# EAGLE board mcat-4cu-b-v2g.job (EAGLE 6.5.0)
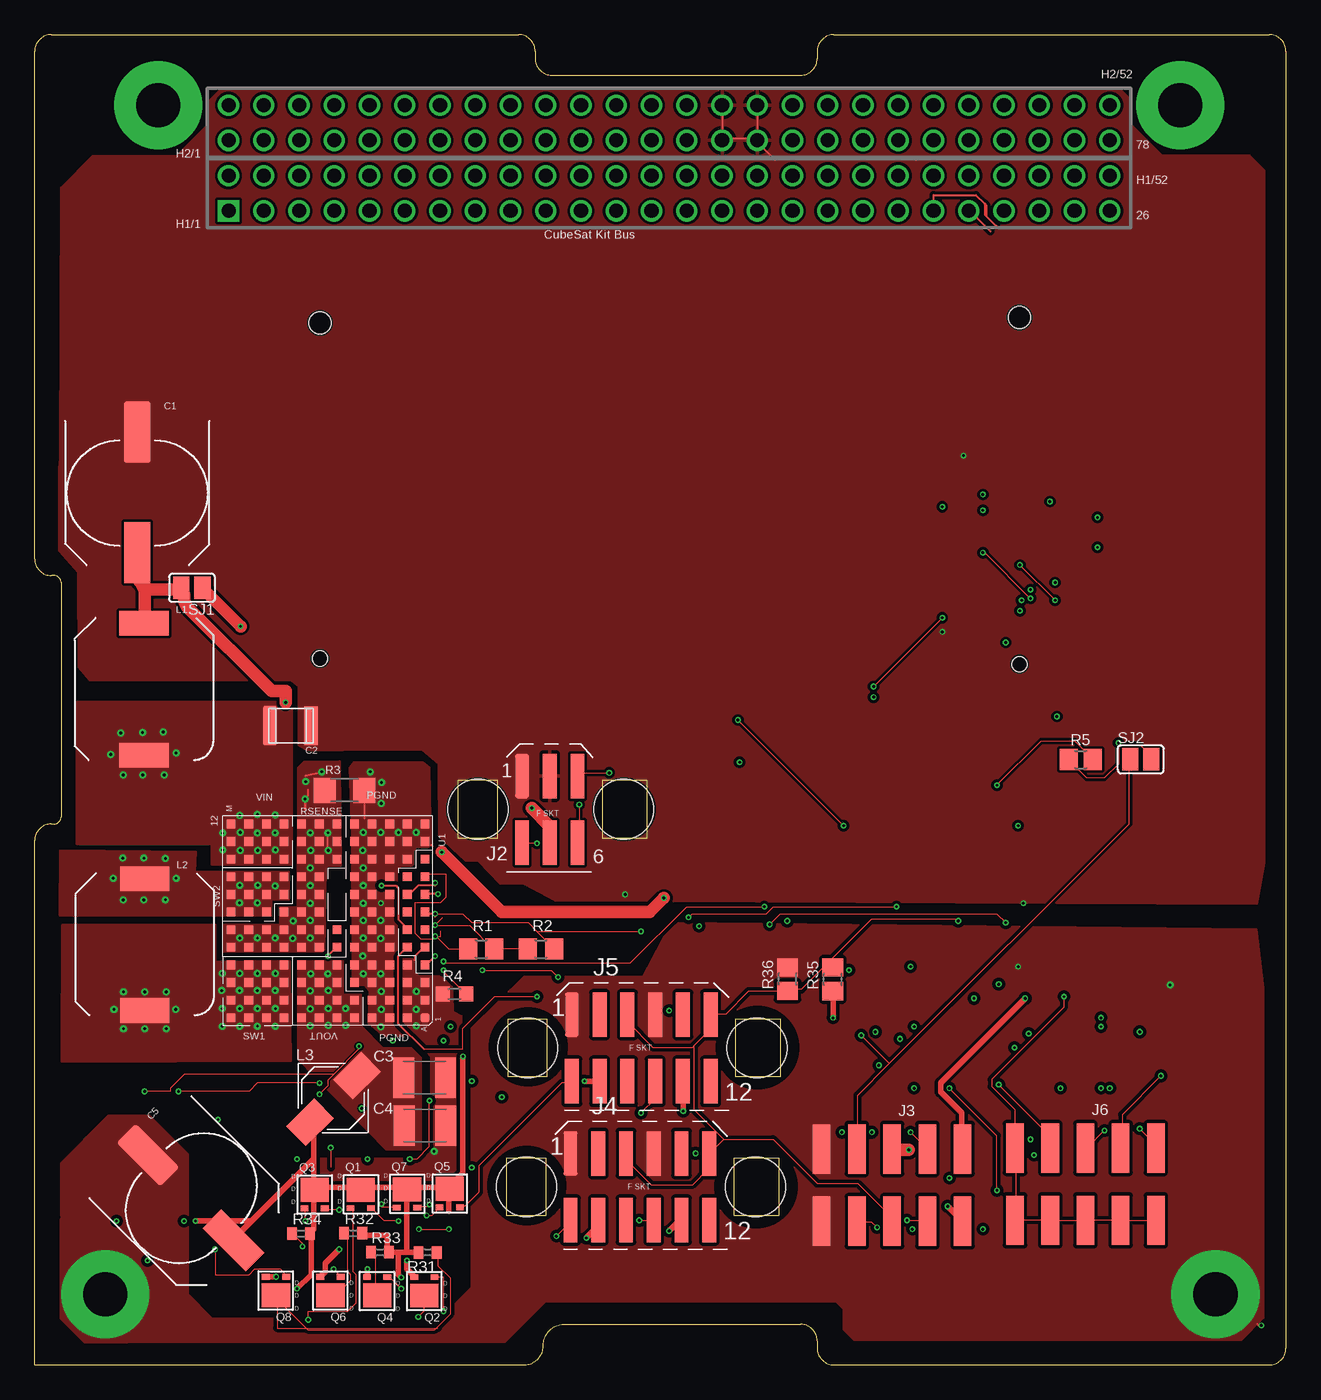
[diagram p0: board, top side]
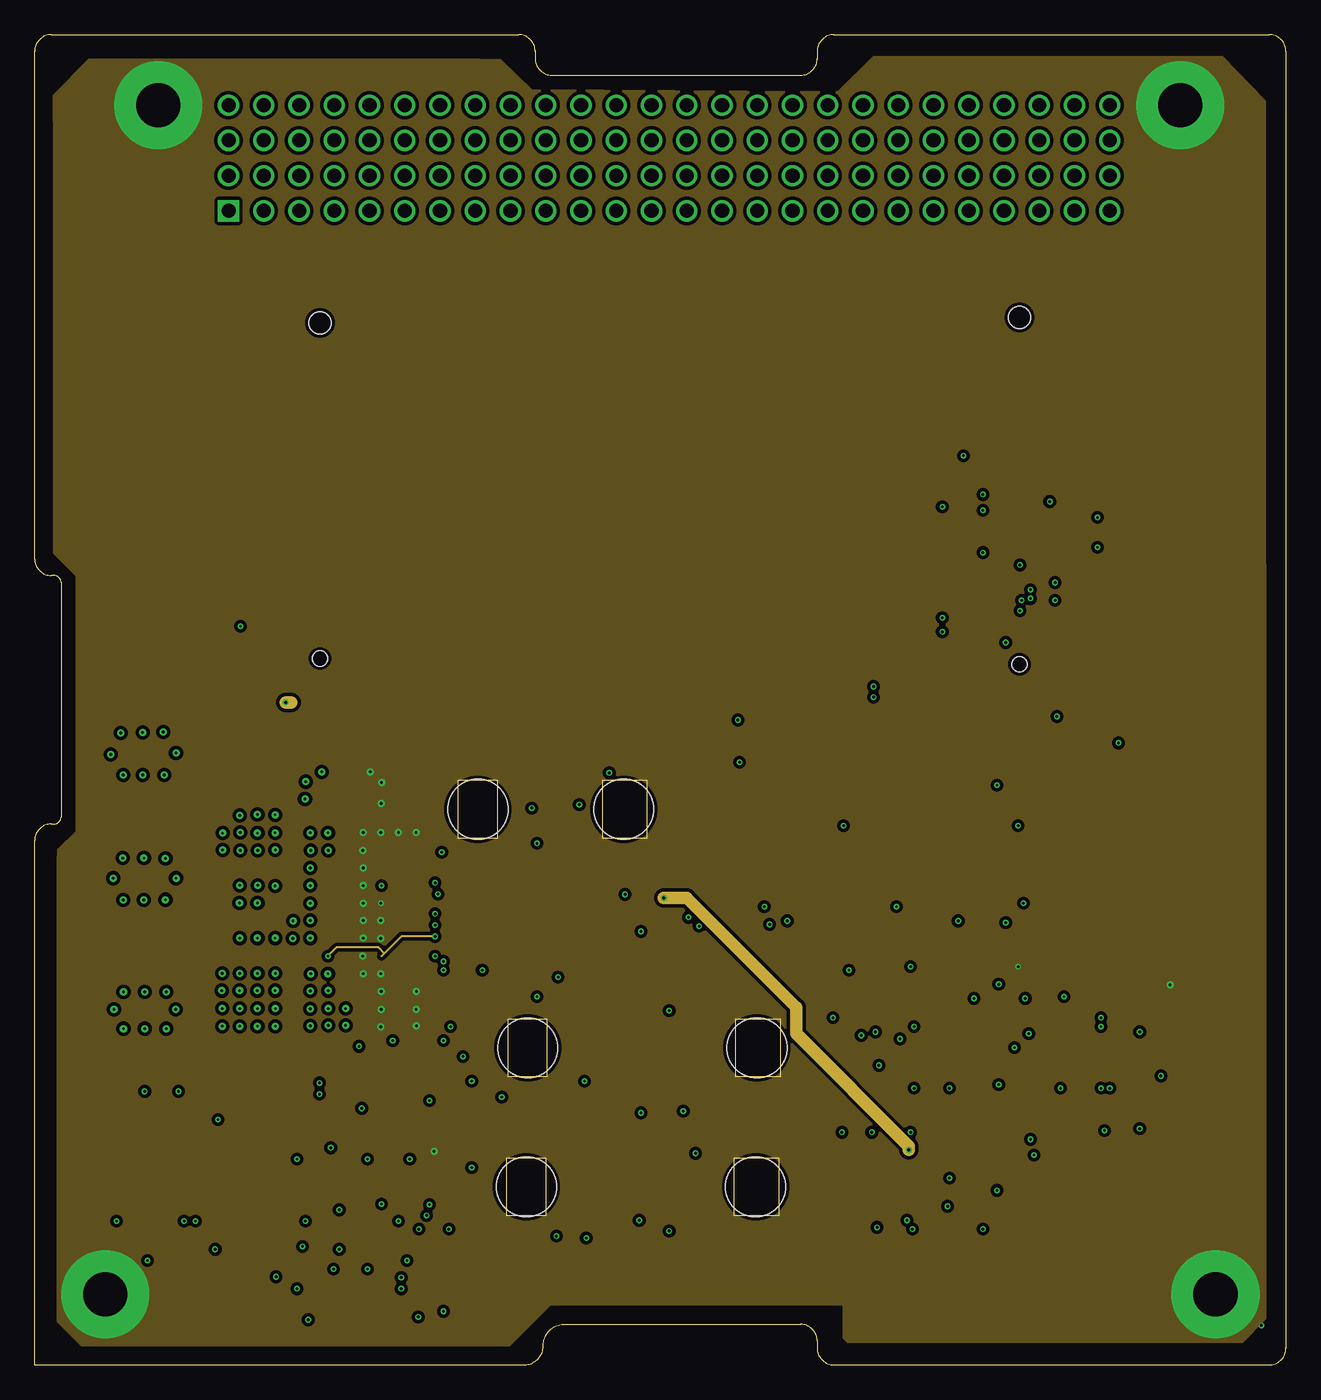
[diagram p1: board, inner layer GND_PLANE]
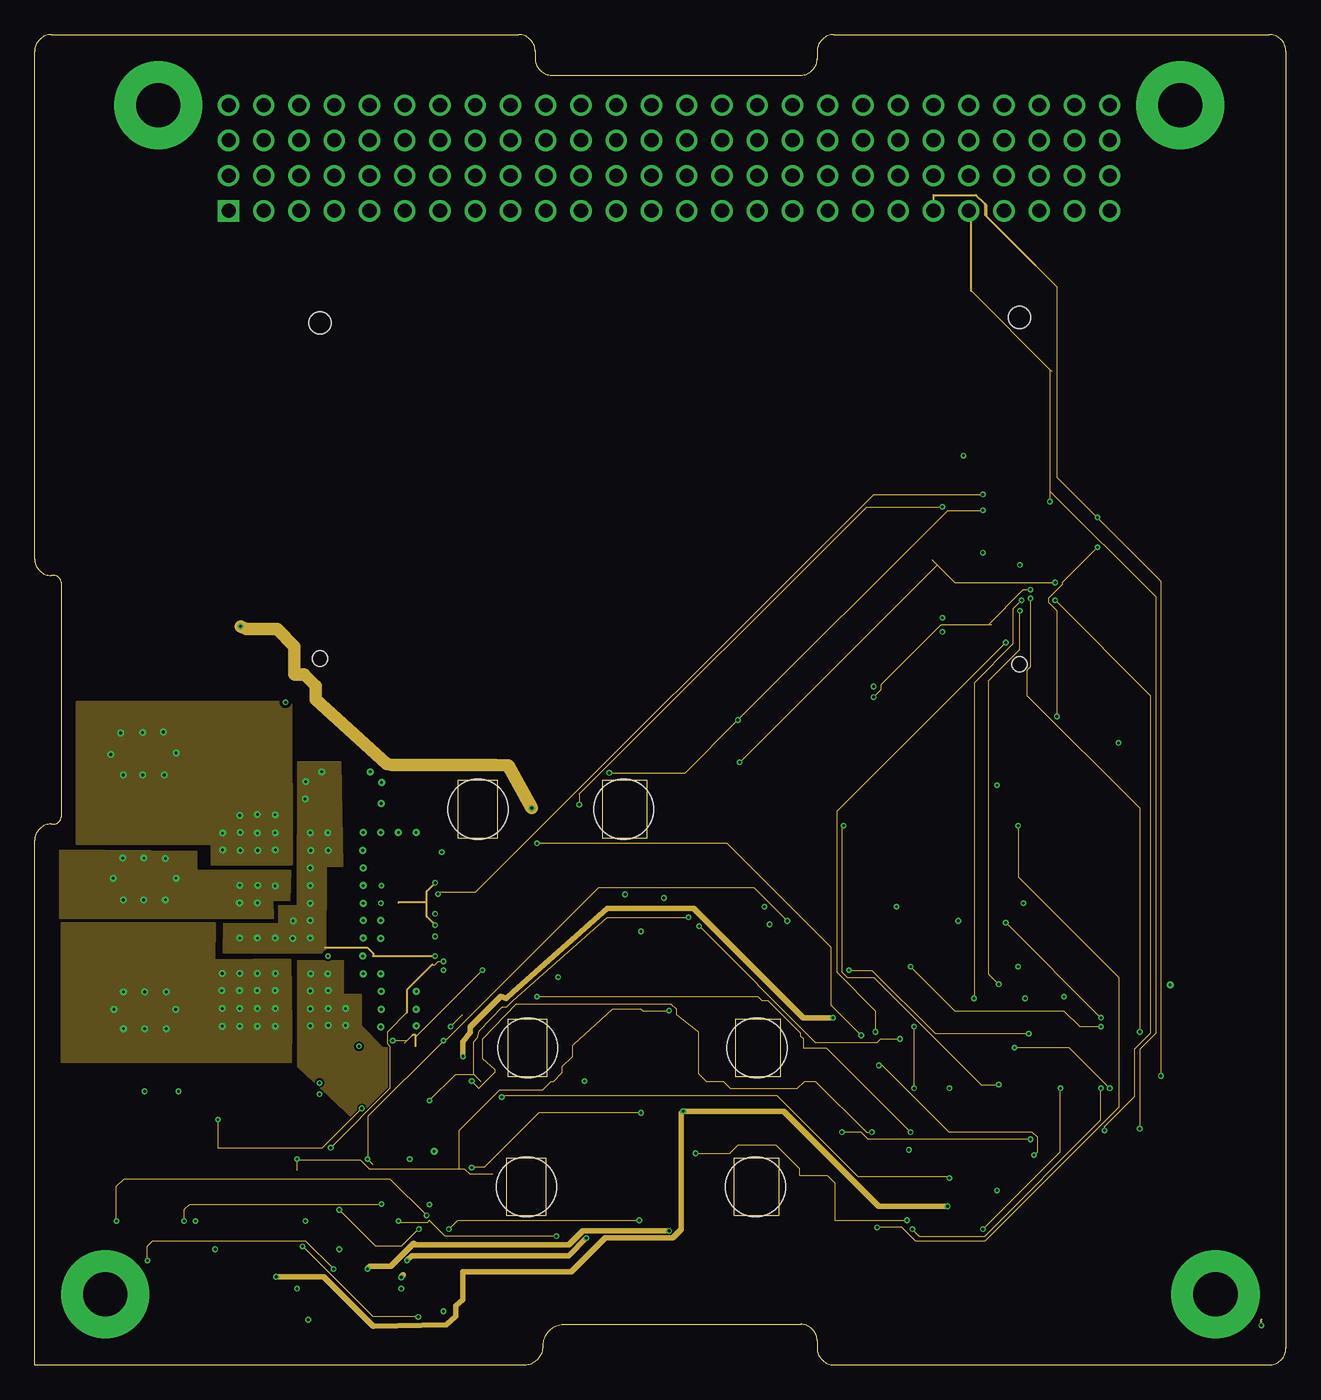
[diagram p2: board, inner layer GND_PLANE/TRACE]
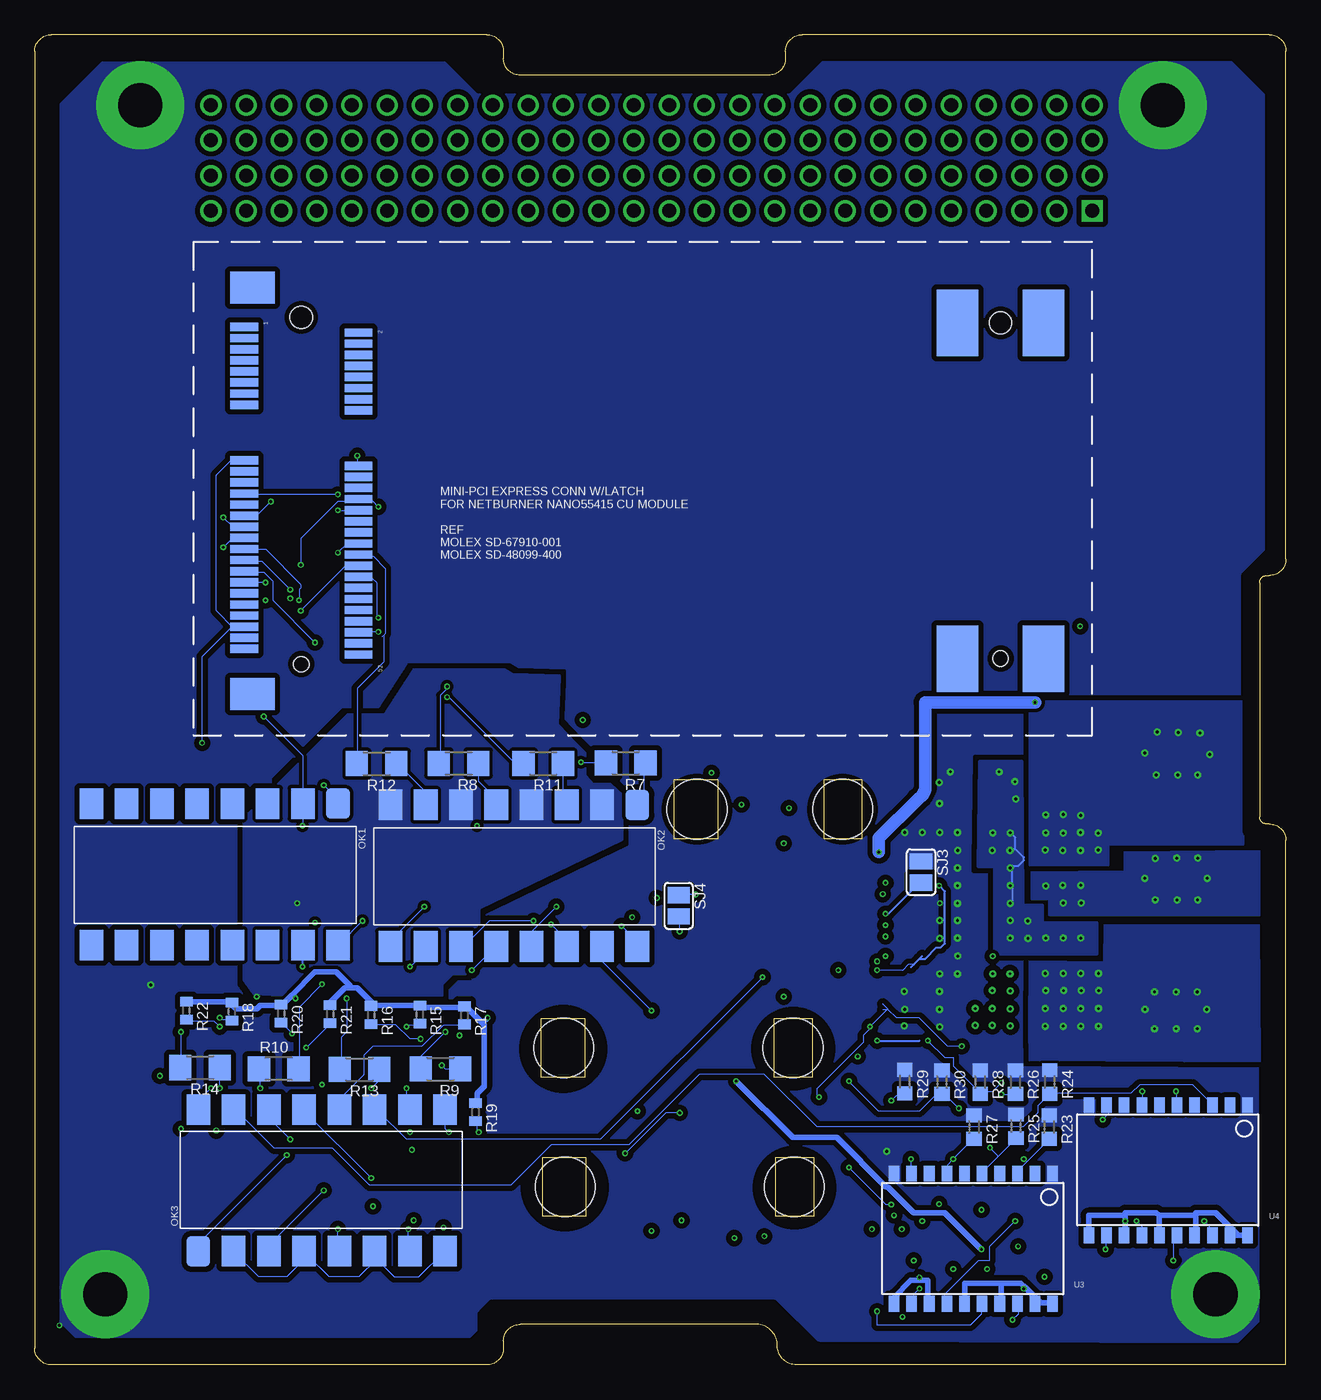
[diagram p3: board, bottom side, seen from below]

Size 90.17 x 95.89 mm. Coordinates in mm from the lower left corner, seen from the top.
Outline: 0,0 34.87,0 35.28,0 arc90 36.65,1.37 arc-90 38.12,2.92 55.19,2.92 arc-90 56.39,1.73 56.39,1.19 arc90 57.58,0 88.98,0 arc90 90.17,1.19 90.17,94.69 arc90 88.98,95.89 57.58,95.89 arc90 56.39,94.69 56.39,94.16 arc-90 55.19,92.96 37.26,92.96 arc-90 36.07,94.16 36.07,94.69 arc90 34.87,95.89 1.19,95.89 arc90 0,94.69 0,58.09 arc90 1.19,56.9 1.4,56.9 arc-90 1.91,56.39 1.91,39.5 arc-90 1.4,38.99 1.19,38.99 arc90 0,37.8 0,0
Copper layers (1+2*15+16): Top 0.035559375mm / dielectric 3.5mil / GND_PLANE 0.01778125mm / dielectric 47mil / GND_PLANE/TRACE 0.01778125mm / dielectric 3.5mil / Bottom 0.035559375mm
Design rules "mcat-4cu-b-v2g *": minimum track width 2mil, minimum drill 8mil, track to track 5mil, track to pad 5mil, pad to pad 5mil, via to via 5mil, smd to smd 5mil, copper to edge 5mil, drill to drill 5mil, minimum pad ring 8mil, minimum via ring 4mil, stop-mask expansion 0mil, vias tented up to drill 8mil, thermal gap 10mil
Net classes: 0 default: clearance 0.205 mm; 1 vout1a2ozcu: width 0.381 mm; 2 vin2a2ozcu: width 0.889 mm
tRestrict: 27 lines
bRestrict: 31 lines

## Footprints (pad centres in the part's own frame; a part is rotated, then mirrored left to right if it is on the bottom)
OS-CON-SVPF-F12 = smd 1.9 x 4.4: A1 0,-4.3; K1 0,4.4
MLCC-X7R-1210 = smd 1 x 2.8: 1 1.6,0.05; 2 -1.35,0.05
C1210K = smd 1.5 x 2.9: 1 -1.5,0; 2 1.5,0
CSK-BUS-PKG = drill 1.016 pad 1.524 square: 1 -29.21,-3.81 | drill 1.016 pad 1.524: 2 -29.21,-1.27; 3 -26.67,-3.81; 4 -26.67,-1.27; 5 -24.13,-3.81; 6 -24.13,-1.27; 7 -21.59,-3.81; 8 -21.59,-1.27; 9 -19.05,-3.81; 10 -19.05,-1.27; 11 -16.51,-3.81; 12 -16.51,-1.27; 13 -13.97,-3.81; 14 -13.97,-1.27; 15 -11.43,-3.81; 16 -11.43,-1.27; 17 -8.89,-3.81; 18 -8.89,-1.27; 19 -6.35,-3.81; 20 -6.35,-1.27; 21 -3.81,-3.81; 22 -3.81,-1.27; 23 -1.27,-3.81; 24 -1.27,-1.27; 25 1.27,-3.81; 26 1.27,-1.27; 27 3.81,-3.81; 28 3.81,-1.27; 29 6.35,-3.81; 30 6.35,-1.27; 31 8.89,-3.81; 32 8.89,-1.27; 33 11.43,-3.81; 34 11.43,-1.27; 35 13.97,-3.81; 36 13.97,-1.27; 37 16.51,-3.81; 38 16.51,-1.27; 39 19.05,-3.81; 40 19.05,-1.27; 41 21.59,-3.81; 42 21.59,-1.27; 43 24.13,-3.81; 44 24.13,-1.27; 45 26.67,-3.81; 46 26.67,-1.27; 47 29.21,-3.81; 48 29.21,-1.27; 49 31.75,-3.81; 50 31.75,-1.27; 51 34.29,-3.81; 52 34.29,-1.27; 53 -29.21,1.27; 54 -29.21,3.81; 55 -26.67,1.27; 56 -26.67,3.81; 57 -24.13,1.27; 58 -24.13,3.81; 59 -21.59,1.27; 60 -21.59,3.81; 61 -19.05,1.27; 62 -19.05,3.81; 63 -16.51,1.27; 64 -16.51,3.81; 65 -13.97,1.27; 66 -13.97,3.81; 67 -11.43,1.27; 68 -11.43,3.81; 69 -8.89,1.27; 70 -8.89,3.81; 71 -6.35,1.27; 72 -6.35,3.81; 73 -3.81,1.27; 74 -3.81,3.81; 75 -1.27,1.27; 76 -1.27,3.81; 77 1.27,1.27; 78 1.27,3.81; 79 3.81,1.27; 80 3.81,3.81; 81 6.35,1.27; 82 6.35,3.81; 83 8.89,1.27; 84 8.89,3.81; 85 11.43,1.27; 86 11.43,3.81; 87 13.97,1.27; 88 13.97,3.81; 89 16.51,1.27; 90 16.51,3.81; 91 19.05,1.27; 92 19.05,3.81; 93 21.59,1.27; 94 21.59,3.81; 95 24.13,1.27; 96 24.13,3.81; 97 26.67,1.27; 98 26.67,3.81; 99 29.21,1.27; 100 29.21,3.81; 101 31.75,1.27; 102 31.75,3.81; 103 34.29,1.27; 104 34.29,3.81
M80-68106 = smd 1 x 3.2: 1 -2,2.4; 2 0,2.4; 3 2,2.4; 4 -2,-2.4; 5 0,-2.4; 6 2,-2.4 | hole 4.318: -5.175,0; 5.335,0
AMPMODU-SMT-PIN-HEADER-5X2 = smd 1.27 x 3.556: 1 -4.826,2.54; 2 -2.286,2.54; 3 0.254,2.54; 4 2.794,2.54; 5 5.334,2.54; 6 -4.826,-2.667; 7 -2.286,-2.667; 8 0.254,-2.667; 9 2.794,-2.667; 10 5.334,-2.667
M80-68112 = smd 1 x 3.2: 1 0,2.4; 2 2,2.4; 3 4,2.4; 4 6,2.4; 5 8,2.4; 6 10,2.4; 7 0,-2.4; 8 2,-2.4; 9 4,-2.4; 10 6,-2.4; 11 8,-2.4; 12 10,-2.4 | hole 4.318: -3.175,0; 13.335,0
MSS1048 = smd 3.56 x 1.78: 1 5,9.85; 2 5,0.35
SERIES-POWER-INDUCTORS = smd 2.85 x 2 rotated 45: 1 1.75,1.6; 2 -1.65,-1.75
PS2501L-4 = smd 2.2 x 1.7: 1 -1.6,19.03; 2 -1.6,16.49; 3 -1.6,13.95; 4 -1.6,11.41; 5 -1.6,8.87; 6 -1.6,6.33; 7 -1.6,3.79; 8 -1.6,1.25; 9 8.6,1.25; 10 8.6,3.79; 11 8.6,6.33; 12 8.6,8.87; 13 8.6,11.41; 14 8.6,13.95; 15 8.6,16.49; 16 8.6,19.03
1206-8-CHIPFET = smd 2.032 x 1.727: D 0,1.321 | smd 0.559 x 0.406: G -0.736,0; S 0.736,0
R0805 = smd 1.3 x 1.5: 1 -0.95,0; 2 0.95,0
R1206 = smd 1.6 x 1.803: 1 -1.422,0; 2 1.422,0
R0603 = smd 1 x 1.1: 1 -0.85,0; 2 0.85,0
R0805' = smd 1.3 x 1.5: 1 -0.85,0; 2 0.85,0
R0402 = smd 0.7 x 0.9: 1 -0.65,0; 2 0.65,0
SJ = smd 1.168 x 1.6: 1 -0.762,0; 2 0.762,0
LGA-141-LTC-05-08-1840-B = smd 0.63 x 0.63: A1 -7.116,-10.192; A2 -5.846,-10.192; A3 -4.576,-10.192; A4 -3.306,-10.192; A5 -2.036,-10.192; A6 -0.766,-10.192; A7 0.504,-10.192; A8 1.774,-10.192; A9 3.044,-10.192; A10 4.314,-10.192; A11 5.584,-10.192; A12 6.854,-10.192; B1 -7.116,-8.922; B2 -5.846,-8.922; B3 -4.576,-8.922; B4 -3.306,-8.922; B5 -2.036,-8.922; B6 -0.766,-8.922; B7 0.504,-8.922; B8 1.774,-8.922; B9 3.044,-8.922; B10 4.314,-8.922; B11 5.584,-8.922; B12 6.854,-8.922; C1 -7.116,-7.652; C2 -5.846,-7.652; C3 -4.576,-7.652; C4 -3.306,-7.652; C5 -2.036,-7.652; C6 -0.766,-7.652; C7 0.504,-7.652; C8 1.774,-7.652; C9 3.044,-7.652; C10 4.314,-7.652; C11 5.584,-7.652; C12 6.854,-7.652; D1 -7.116,-6.382; D2 -5.846,-6.382; D3 -4.576,-6.382; D4 -3.306,-6.382; D5 -2.036,-6.382; D6 -0.766,-6.382; D7 0.504,-6.382; D8 1.774,-6.382; D9 3.044,-6.382; D10 4.314,-6.382; D11 5.584,-6.382; D12 6.854,-6.382; E1 -7.116,-5.112; E2 -5.846,-5.112; E3 -4.576,-5.112; E4 -3.306,-5.112; E5 -2.036,-5.112; E6 -0.766,-5.112; E7 0.504,-5.112; E8 1.774,-5.112; E9 3.044,-5.112; E10 4.314,-5.112; E11 5.584,-5.112; E12 6.854,-5.112; F1 -7.116,-3.842; F2 -5.846,-3.842; F3 -4.576,-3.842; F4 -3.306,-3.842; F5 -2.036,-3.842; F6 -0.766,-3.842; F10 4.314,-3.842; F11 5.584,-3.842; F12 6.854,-3.842; G1 -7.116,-2.572; G2 -5.846,-2.572; G3 -4.576,-2.572; G4 -3.306,-2.572; G5 -2.036,-2.572; G6 -0.766,-2.572; G7 0.504,-2.572; G8 1.774,-2.572; G9 3.044,-2.572; G10 4.314,-2.572; G11 5.584,-2.572; G12 6.854,-2.572; H2 -5.846,-1.302; H3 -4.576,-1.302; H4 -3.306,-1.302; H5 -2.036,-1.302; H6 -0.766,-1.302; H7 0.504,-1.302; H8 1.774,-1.302; H9 3.044,-1.302; H10 4.314,-1.302; H11 5.584,-1.302; H12 6.854,-1.302; J5 -2.036,-0.032; J6 -0.766,-0.032; J7 0.504,-0.032; J8 1.774,-0.032; J9 3.044,-0.032; J10 4.314,-0.032; J11 5.584,-0.032; J12 6.854,-0.032; K5 -2.036,1.238; K6 -0.766,1.238; K7 0.504,1.238; K8 1.774,1.238; K9 3.044,1.238; K10 4.314,1.238; K11 5.584,1.238; K12 6.854,1.238; L5 -2.036,2.508; L6 -0.766,2.508; L7 0.504,2.508; L8 1.774,2.508; L9 3.044,2.508; L10 4.314,2.508; L11 5.584,2.508; L12 6.854,2.508; M5 -2.036,3.778; M6 -0.766,3.778; M7 0.504,3.778; M8 1.774,3.778; M9 3.044,3.778; M10 4.314,3.778; M11 5.584,3.778; M12 6.854,3.778; SW1@J1 -7.116,-0.032; SW1@J2 -5.846,-0.032; SW1@J3 -4.576,-0.032; SW1@J4 -3.306,-0.032; SW1@K1 -7.116,1.238; SW1@K2 -5.846,1.238; SW1@K3 -4.576,1.238; SW1@K4 -3.306,1.238; SW1@L1 -7.116,2.508; SW1@L2 -5.846,2.508; SW1@L3 -4.576,2.508; SW1@L4 -3.306,2.508; SW1@M1 -7.116,3.778; SW1@M2 -5.846,3.778; SW1@M3 -4.576,3.778; SW1@M4 -3.306,3.778; VOUT -7.116,-1.302
MOLEX-MINI-PCI-EXPRESS-8MM-52CKT = smd 0.6 x 2: 1 -11.65,-26.8; 2 -11.248,-18.576; 3 -10.85,-26.8; 4 -10.447,-18.576; 5 -10.05,-26.8; 6 -9.648,-18.576; 7 -9.25,-26.8; 8 -8.848,-18.576; 9 -8.45,-26.8; 10 -8.047,-18.576; 11 -7.65,-26.8; 12 -7.247,-18.576; 13 -6.85,-26.8; 14 -6.447,-18.576; 15 -6.05,-26.8; 16 -5.647,-18.576; 17 -2.05,-26.8; 18 -1.647,-18.576; 19 -1.25,-26.8; 20 -0.848,-18.576; 21 -0.45,-26.8; 22 -0.048,-18.576; 23 0.35,-26.8; 24 0.752,-18.576; 25 1.15,-26.8; 26 1.552,-18.576; 27 1.95,-26.8; 28 2.353,-18.576; 29 2.75,-26.8; 30 3.152,-18.576; 31 3.55,-26.8; 32 3.953,-18.576; 33 4.35,-26.8; 34 4.753,-18.576; 35 5.15,-26.8; 36 5.553,-18.576; 37 5.95,-26.8; 38 6.353,-18.576; 39 6.75,-26.8; 40 7.152,-18.576; 41 7.55,-26.8; 42 7.952,-18.576; 43 8.35,-26.8; 44 8.752,-18.576; 45 9.15,-26.8; 46 9.553,-18.576; 47 9.95,-26.8; 48 10.352,-18.576; 49 10.75,-26.8; 50 11.152,-18.576; 51 11.55,-26.8; 52 11.953,-18.576 | smd 2.3 x 3.2: P$1 -14.5,-26.2; P$2 14.8,-26.2 | smd 4.8 x 3: P$3 12.25,24.6; P$4 -11.95,24.6; P$5 -11.95,30.8; P$6 12.25,30.8 | hole 1.6: -12.35,-22.7; -11.95,27.7 | hole 1.1: 12.65,-22.7; 12.25,27.7
20-LEAD-PLASTIC-SO = smd 0.762 x 1.143: 1 0,0; 2 1.27,0; 3 2.54,0; 4 3.81,0; 5 5.08,0; 6 6.35,0; 7 7.62,0; 8 8.89,0; 9 10.16,0; 10 11.43,0; 11 11.43,9.398; 12 10.16,9.398; 13 8.89,9.398; 14 7.62,9.398; 15 6.35,9.398; 16 5.08,9.398; 17 3.81,9.398; 18 2.54,9.398; 19 1.27,9.398; 20 0,9.398

## Placement (x,y rotation side)
C1  68uF  [OS-CON-SVPF-F12]  7.39,62.84 0 top
C2  4.7uF  [MLCC-X7R-1210]  18.56,46.12 180 top
C3  10uF  [C1210K]  28.1,20.7 0 top
C4  10uF  [C1210K]  28.13,17.24 0 top
C5  68uF  [OS-CON-SVPF-F12]  11.29,12.01 45 top
J1  2 x ESQ-126-39-G-D  [CSK-BUS-PKG]  43.18,87 0 top
J2  M80-6810642  [M80-68106]  37.12,40.04 0 top
J3  AMPMODU 5X2 SMT HDR  [AMPMODU-SMT-PIN-HEADER-5X2]  61.53,13.02 0 top
J4  M80-6811242  [M80-68112]  38.61,12.84 0 top
J5  M80-6811242  [M80-68112]  38.71,22.84 0 top
J6  AMPMODU 5X2 SMT HDR  [AMPMODU-SMT-PIN-HEADER-5X2]  75.46,13.08 0 top
L1  33 uH  [MSS1048]  2.89,43.6 0 top
L2  330 uH  [MSS1048]  2.93,25.2 0 top
L3  10 uH  [SERIES-POWER-INDUCTORS]  21.48,19.23 0 top
OK1  PS2501L-4  [PS2501L-4]  87.34,38.86 270 bottom
OK2  PS2501L-4  [PS2501L-4]  65.78,38.76 270 bottom
OK3  PS2501L-4  [PS2501L-4]  59.34,9.79 90 bottom
Q1  SI5404BDC  [1206-8-CHIPFET]  23.5,11.31 0 top
Q2  SI5404BDC  [1206-8-CHIPFET]  28.08,6.32 180 top
Q3  SI5404BDC  [1206-8-CHIPFET]  20.17,11.28 0 top
Q4  SI5404BDC  [1206-8-CHIPFET]  24.68,6.32 180 top
Q5  SI5404BDC  [1206-8-CHIPFET]  29.9,11.35 0 top
Q6  SI5404BDC  [1206-8-CHIPFET]  21.32,6.34 180 top
Q7  SI5404BDC  [1206-8-CHIPFET]  26.83,11.33 0 top
Q8  SI5404BDC  [1206-8-CHIPFET]  17.38,6.34 180 top
R1  3K79  [R0805]  32.18,29.97 0 top
R2  1K  [R0805]  36.48,29.97 0 top
R3  70 mOhms  [R1206]  22.33,41.41 0 top
R4  4k7 0.1%  [R0603]  30.26,26.73 0 top
R5  1K  [R0805']  75.38,43.63 0 top
R7  5K42  [R1206]  47.58,43.37 180 bottom
R8  5K42  [R1206]  59.63,43.36 180 bottom
R9  5K42  [R1206]  60.94,21.32 180 bottom
R10  5K42  [R1206]  72.59,21.34 0 bottom
R11  5K42  [R1206]  53.53,43.35 180 bottom
R12  5K42  [R1206]  65.53,43.33 180 bottom
R13  5K42 0.1%  [R1206]  66.77,21.3 180 bottom
R14  5K42 0.1%  [R1206]  78.26,21.42 180 bottom
R15  R-US_R0402  [R0402]  62.42,25.24 270 bottom
R16  100K 0.1%  [R0402]  65.92,25.22 270 bottom
R17  100K 0.1%  [R0402]  59.2,25.19 270 bottom
R18  100K 0.1%  [R0402]  75.96,25.46 270 bottom
R19  100K 0.1%  [R0402]  58.41,18.22 270 bottom
R20  100K 0.1%  [R0402]  72.41,25.31 270 bottom
R21  100K 0.1%  [R0402]  68.87,25.28 270 bottom
R22  100K 0.1%  [R0402]  79.24,25.53 270 bottom
R23  51K 0.1%  [R0603]  17.07,17.14 270 bottom
R24  51K 0.1%  [R0603]  17.03,20.39 270 bottom
R25  51K 0.1%  [R0603]  19.46,17.19 270 bottom
R26  51K 0.1%  [R0603]  19.5,20.37 270 bottom
R27  51K 0.1%  [R0603]  22.48,17.13 270 bottom
R28  51K 0.1%  [R0603]  22.04,20.37 270 bottom
R29  51k 0.1%  [R0603]  27.47,20.41 270 bottom
R30  51k 0.1%  [R0603]  24.79,20.37 270 bottom
R31  0.1R  [R0402]  28.32,8.11 180 top
R32  0.1R  [R0402]  22.95,9.49 0 top
R33  0.1R  [R0402]  24.88,8.11 0 top
R34  0.1R  [R0402]  19.19,9.46 0 top
R35  180R  [R0805']  57.51,27.79 90 top
R36  1K  [R0805']  54.25,27.81 90 top
SJ1  0R  [SJ]  11.33,56.01 180 top
SJ2  0R  [SJ]  79.7,43.65 0 top
SJ3  0R  [SJ]  26.3,35.52 270 bottom
SJ4  0R  [SJ]  43.77,33.09 270 bottom
U1  LTM4609MPV#PBF  [LGA-141-LTC-05-08-1840-B]  17.93,32.14 90 top
U2  UCAT-4CU-B-CONTROL-UNITNANO55415  [MOLEX-MINI-PCI-EXPRESS-8MM-52CKT]  48.26,63.16 270 bottom
U3  LT1161ISW  [20-LEAD-PLASTIC-SO]  16.82,13.79 180 bottom
U4  LT1161ISW  [20-LEAD-PLASTIC-SO]  2.77,18.73 180 bottom

## Library data of the parts
C1 C2 C5 J1-J6 L1 L2 OK1-OK3 Q1-Q8 U1-U4 = gwu_mpnl_ucat_v8
C3 C4 R1 R2 R31-R34 = rcl
L3 = gwu_mpnl_ucat_v8; MF: PANASONIC; MPN: ELL5PS100M; OC_FARNELL: 1717452
R3-R5 R7-R30 R35 R36 = resistor
SJ1-SJ4 = jumper

## Nets
CH1_P18H [vout1a2ozcu]: J4.8 Q2.S
CH1_P18L: J4.7 Q1.S
CH1HG: Q2.G U3.16
CH1LG: Q1.G U3.18
CH1S: Q2.D R34.1
CH2_P18H [vout1a2ozcu]: J4.11 Q4.S
CH2_P18L: J4.10 Q3.S
CH2HG: Q4.G U3.12
CH2LG: Q3.G U3.14
CH2S: Q4.D R33.1
CH3_P18H [vout1a2ozcu]: J5.8 Q6.S
CH3_P18L: J5.7 Q5.S
CH3HG: Q6.G U4.16
CH3LG: Q5.G U4.18
CH3S: Q6.D R32.1
CH4_P18H [vout1a2ozcu]: J3.10 J5.11 Q8.S
CH4_P18L: J3.9 J5.10 Q7.S
CH4HG: Q8.G U4.12
CH4LG: Q7.G U4.14
CH4S: Q8.D R31.1
GBD: OK3.2 OK3.4 OK3.6 OK3.8
GND: C1.K1 C2.2 J1.81 J1.82 J1.83 J1.84 J2.1 J2.2 J6.1 J6.6 J6.7 J6.8 J6.9 J6.10 OK2.2 OK2.4 OK2.6 OK2.8 SJ4.1 U2.18 U2.48
I2C(CLK): J1.43 J6.5 U2.27
I2C(DATA): J1.41 J6.4 U2.29
INTVCC: R1.1 U1.A9 U1.F5
N$4: OK2.16 R16.2
N$5: OK2.14 R18.2
N$7: OK2.12 R20.2
N$9: OK2.10 R22.2
N$10: OK3.16 R21.2
N$11: OK3.14 R19.2
N$12: OK3.12 R17.2
N$13: OK3.10 R15.2
N$16: OK1.1 R5.2
OK1E1: OK2.15 R23.2 U3.3
OK1E2: OK2.13 R25.2 U3.5
OK1E3: OK2.11 R27.2 U3.7
OK1E4: OK2.9 R29.2 U3.9
OK2E1: OK3.15 R24.2 U4.3
OK2E2: OK3.13 R26.2 U4.5
OK2E3: OK3.11 R28.2 U4.7
OK2E4: OK3.9 R30.2 U4.9
P3: R5.1 SJ2.2 U2.17 U2.47
P3_SW: J2.4 J3.2 SJ2.1
P18_SW1: OK2.1 R7.1
P18_SW2: OK2.5 R8.1
P18_SW3: OK3.1 R9.1
P18_SW4: OK3.5 R10.1
P18_SW5: OK2.3 R11.1
P18_SW6: OK2.7 R12.1
P18_SW7: OK3.3 R13.1
P18_SW8: OK3.7 R14.1
PBATT_SW [vin2a2ozcu]: J2.5 SJ1.1
PGND: C3.2 C4.2 C5.K1 J3.1 J3.6 J4.1 J4.4 J5.1 J5.4 OK1.15 R3.2 R4.1 R23.1 R24.1 R25.1 R26.1 R27.1 R28.1 R29.1 R30.1 R36.2 SJ3.1 U1.A1 U1.A2 U1.A3 U1.A5 U1.A11 U1.A12 U1.B1 U1.B2 U1.B3 U1.B4 U1.B10 U1.B11 U1.B12 U1.C1 U1.C2 U1.C3 U1.C4 U1.C5 U1.C6 U1.C7 U1.C8 U1.C9 U1.C10 U1.C11 U1.C12 U1.D1 U1.D2 U1.D3 U1.D4 U1.D5 U1.D6 U1.D7 U1.D8 U1.D9 U1.D10 U1.D11 U1.D12 U1.E3 U1.E4 U1.E5 U1.E6 U1.E7 U1.E8 U1.E9 U1.E10 U1.E11 U1.E12 U3.1 U3.10 U4.1 U4.10
PGOOD_PMA: J3.4 U1.B5
RSENSE: R3.1 U1.A4 U1.F10 U1.F11 U1.F12 U1.G5 U1.G6 U1.G7 U1.G8 U1.G9 U1.G10 U1.G11 U1.G12 U1.H5 U1.H6 U1.H7 U1.H8 U1.H9 U1.H10 U1.H11 U1.H12 U1.J5 U1.J6 U1.J7 U1.K5 U1.K6 U1.L5 U1.L6 U1.M5 U1.M6
SETFREQ: R1.2 R2.1 U1.B8
SGND: R2.2 SJ3.2 SJ4.2 U1.A7
SW1: L2.2 U1.SW1@J1 U1.SW1@J2 U1.SW1@J3 U1.SW1@J4 U1.SW1@K1 U1.SW1@K2 U1.SW1@K3 U1.SW1@K4 U1.SW1@L1 U1.SW1@L2 U1.SW1@L3 U1.SW1@L4 U1.SW1@M1 U1.SW1@M2 U1.SW1@M3 U1.SW1@M4
SW2: L2.1 U1.J8 U1.J9 U1.K7 U1.K8 U1.K9 U1.L7 U1.L8 U1.L9 U1.M7 U1.M8 U1.M9
SW_P18H1: R11.2 U2.35
SW_P18H2: R12.2 U2.34
SW_P18H3: R13.2 U2.33
SW_P18H4: R14.2 U2.32
SW_P18L1: R7.2 U2.39
SW_P18L2: R8.2 U2.38
SW_P18L3: R9.2 U2.37
SW_P18L4: R10.2 U2.36
SW_RUNPMA: U1.A8 U2.23
SW_TP1: J3.7 OK1.2 U2.31
TP1_OUT: J3.8 J4.3 J4.6 J5.3 J5.6 OK1.16 R35.2 R36.1
UART0_RX: J2.6 J6.3 U2.24
UART0_TX: J2.3 J6.2 U2.26
VBATT_IN [vin2a2ozcu]: C1.A1 J3.3 L1.1 SJ1.2
VFB: R4.2 U1.B6
VIN: C2.1 L1.2 U1.J10 U1.J11 U1.J12 U1.K10 U1.K11 U1.K12 U1.L10 U1.L11 U1.L12 U1.M10 U1.M11 U1.M12
VOUT [vout1a2ozcu]: C3.1 C4.1 L3.1 U1.E1 U1.E2 U1.F1 U1.F2 U1.F3 U1.F4 U1.G1 U1.G2 U1.G3 U1.G4 U1.H2 U1.H3 U1.H4 U1.VOUT
VOUTA [vout1a2ozcu]: C5.A1 J3.5 L3.2 Q1.D Q3.D Q5.D Q7.D R15.1 R16.1 R17.1 R18.1 R19.1 R20.1 R21.1 R22.1 R31.2 R32.2 R33.2 R34.2 R35.1 U3.11 U3.13 U3.15 U3.17 U3.19 U3.20 U4.11 U4.13 U4.15 U4.17 U4.19 U4.20

## Tracks (layer width: path | path; a pad name or v marks a point on that pad's centre or on a via)
CH1_P18H  (via drill 0.2)
  Top 0.381: v26.82,7.52 26.82,6.91 27.23,6.5 Q2.S | v39.75,9.14 40.51,9.91 40.51,10.41 J4.8
  GND_PLANE/TRACE 0.381: v26.82,7.52 27.18,7.87 38.48,7.87 v39.75,9.14
CH1_P18L  (via drill 0.2)
  Top 0.051: v26.21,10.36 25.2,10.36 24.38,11.18 Q1.S | v37.59,9.27 38.73,10.41 J4.7
  GND_PLANE/TRACE 0.051: v26.21,10.36 26.29,10.29 28.32,10.29 28.45,10.41 29.59,9.27 v37.59,9.27
CH1HG  (via drill 0.2)
  Top 0.051: v29.46,3.86 29.46,6.3 28.85,6.3 Q2.G
  Bottom 0.051: v29.46,3.86 29.46,2.85 22.76,2.85 21.95,3.66 21.95,4.27 U3.16
CH1LG  (via drill 0.2)
  Top 0.051: v19.71,3.25 19.71,3.86 22.55,3.86 23.16,4.47 23.16,6.5 22.96,6.71 22.96,11.18 Q1.G
  Bottom 0.051: v19.71,3.25 19.3,3.66 19.3,4.27 U3.18
CH1S  (via drill 0.2)
  Top 0.051: v19.3,8.53 19.3,8.74 18.69,9.35 R34.1 | v27.64,3.45 28.04,3.86 28.04,4.88 Q2.D
  GND_PLANE/TRACE 0.051: v19.3,8.53 24.38,3.45 v27.64,3.45
CH2_P18H  (via drill 0.2)
  Top 0.381: v23.98,6.91 23.98,6.5 Q4.S | v45.72,9.65 46.61,10.54 J4.11
  GND_PLANE/TRACE 0.381: v23.98,6.91 24,6.99 24.13,7.11 25.65,7.11 27.3,8.76 27.43,8.64 38.48,8.64 39.5,9.65 v45.72,9.65
CH2_P18L  (via drill 0.2)
  Top 0.051: v21.95,11.18 20.93,11.18 Q3.S | v27.69,9.78 v29.84,9.78 | v43.56,10.41 44.58,10.41 J4.10
  GND_PLANE/TRACE 0.051: v21.95,11.18 24.59,8.53 26.42,8.53 27.67,9.79 | 27.84,9.96 27.8,9.92 | 27.8,9.92 27.67,9.79 | 27.81,9.91 27.8,9.92 | v27.69,9.78 27.67,9.79 | v43.56,10.41 30.48,10.41 v29.84,9.78
CH2HG  (via drill 0.2)
  Top 0.051: v26.42,5.49 25.6,6.3 Q4.G
  Bottom 0.051: v26.42,5.49 26.82,5.08 26.82,4.47 U3.12
CH2LG  (via drill 0.2)
  Top 0.051: v19.51,10.36 19.51,11.18 Q3.G
  Bottom 0.051: v19.51,10.36 21.34,8.53 21.34,7.52 22.15,7.52 24.59,5.08 24.59,4.47 U3.14
CH2S
  Top 0.051: R33.1 24.38,7.92 24.59,7.72 24.59,5.08 Q4.D
CH3_P18H  (via drill 0.2)
  Top 0.381: v21.95,8.33 20.93,7.32 20.93,6.71 20.73,6.5 Q6.S | v39.62,20.45 40.64,20.45 J5.8
  Bottom 0.381: v21.95,8.33 24.59,10.97 26.82,10.97 28.65,12.8 28.83,12.83 32.38,16.38 35.56,16.38 v39.62,20.45
CH3_P18L
  Top 0.051: Q5.S 30.73,11.43 30.99,11.43 32,12.45 32,14.35 37.97,20.32 38.61,20.32 J5.7
CH3HG  (via drill 0.2)
  Top 0.051: v21.54,6.91 21.95,6.5 Q6.G
  GND_PLANE/TRACE 0.051: v21.54,6.91 19.51,8.94 8.51,8.94 8.13,8.56 v8.13,7.52
  Bottom 0.051: 7.92,7.52 v8.13,7.52 8.13,9.14 7.92,9.14 U4.16
CH3LG  (via drill 0.2)
  Top 0.051: v28.25,10.77 28.65,10.77 29.06,11.18 Q5.G
  GND_PLANE/TRACE 0.051: v28.25,10.77 25.6,13.41 6.44,13.41 5.89,12.87 v5.89,10.36
  Bottom 0.051: v5.89,10.36 5.49,9.96 5.49,9.35 U4.18
CH3S
  Top 0.051: R32.1 22.35,9.35 22.55,9.14 22.55,6.71 22.76,6.5 22.76,6.1 21.74,5.08 21.34,5.08 Q6.D
CH4_P18H  (via drill 0.2)
  Top 0.381: v17.4,6.35 16.76,6.35 Q8.S | v46.74,18.29 46.74,20.32 J5.11 | v65.79,11.43 66.8,10.41 J3.10
  GND_PLANE/TRACE 0.381: v17.4,6.35 20.83,6.35 24.38,2.79 29.64,2.87 30.35,3.5 30.35,4.27 30.84,4.67 30.86,6.71 38.66,6.71 41.1,9.14 45.97,9.14 46.61,9.78 46.61,18.16 v46.74,18.29 53.98,18.29 60.83,11.43 v65.79,11.43
CH4_P18L  (via drill 0.2)
  Top 0.051: 28.45,11.58 v28.45,11.56 28.45,11.38 27.64,11.38 Q7.S | v43.69,18.16 44.7,19.18 44.7,20.32 J5.10 | v62.87,10.41 64.26,10.41 J3.9
  GND_PLANE/TRACE 0.051: v31.5,14.22 32.38,14.22 36.32,18.16 v43.69,18.16 | v62.87,10.41 57.66,10.41 57.66,13.13 57.12,13.66 55.09,13.66 55.09,14.17 53.42,15.85 50.7,15.85 50.09,15.24 v47.62,15.24
  Bottom 0.051: v28.45,11.56 28.83,11.56 v31.5,14.22 | v47.62,15.24 44.7,18.16 v43.69,18.16
CH4HG  (via drill 0.2)
  Top 0.051: v13.01,8.33 13.01,6.5 15.44,6.5 15.85,6.91 17.68,6.91 18.09,6.5 Q8.G
  Bottom 0.051: v13.01,8.33 13.01,9.14 U4.12
CH4LG  (via drill 0.2)
  Top 0.051: v24.99,11.58 24.99,11.38 26.01,11.38 Q7.G
  GND_PLANE/TRACE 0.051: v10.77,10.36 10.77,11.2 11.16,11.58 v24.99,11.58
  Bottom 0.051: v10.77,10.36 10.36,9.96 10.36,9.35 U4.14
CH4S
  Top 0.051: 29.06,2.64 17.48,2.64 17.48,4.88 Q8.D 17.27,4.95 19.68,2.54 28.83,2.54 29.97,3.68 29.97,6.22 29.08,7.11 29.08,8 R31.1 29.06,7.92
GBD
  Bottom 0.051: 65.53,7.62 65.66,7.75 65.66,8.13 OK3.6 65.53,7.62 | 65.53,7.62 64.26,6.35 62.48,6.35 60.71,8.13 OK3.8 | 70.48,7.87 68.96,6.35 66.8,6.35 65.53,7.62 | 70.48,7.87 70.74,8.13 OK3.4 70.48,7.87 | 70.48,7.87 72.01,6.35 74.04,6.35 75.82,8.13 OK3.2
GND  (via drill 0.2)
  Top 0.051: J6.10 J6.9 J6.8 J6.7 70.74,10.41 | 70.74,10.41 70.74,15.62 J6.1 70.61,15.62 70.61,18.41 68.96,20.07 68.96,20.57 74.17,25.78 v74.17,26.54 | 70.74,10.41 J6.6
  Top 0.152: J1.82 49.53,88.39 | J1.84 52.07,88.39 | 52.07,88.39 49.53,88.39 | 49.53,88.39 J1.81 | 52.07,88.39 J1.83 52.07,88.14 53.24,86.97 | 53.24,86.97 53.34,86.87 63.5,86.87 | 63.6,86.97 53.24,86.97
  Bottom 0.051: v65.41,52.83 66.8,52.83 U2.48 | v66.93,65.53 66.93,64.9 U2.18 | v42.55,33.91 43.69,33.91 SJ4.1 | v74.17,26.54 74.17,26.67 74.17,26.73
  Bottom 0.152: 52.07,88.14 J1.83
  other vias: 71.25,33.27
  pour Top: 12.42,90.55 12.42,90.98 13.44,92 78.18,92 79.02,91.16 79.02,89.38 81.2,87.2 87.53,87.2 88.6,86.13 88.6,36.17 88.06,33.2 37.54,33.43 35.31,34.65 33.55,34.67 31.98,36.32 31.06,36.32 29.16,38.1 29.1,43.3 27.93,44.34 22.17,44.27 19.63,44.27 19.02,44.65 19.02,48.9 18.52,49.3 3.99,49.33 3.18,50.32 3.15,57.1 1.75,58.67 1.78,64.64 1.83,65.35 1.91,84.86 4.19,87.15 10.24,87.15 12.47,89.38 12.47,90.47
  pour Bottom (isolate 0.254, no thermals): 67.64,46.89 75.16,39.37 75.16,31.52 75.13,27.76 74.42,26.75 71.15,26.57 67.16,26.57 67.11,26.62 60.78,26.62 60.78,27.41 60.02,28.17 59.05,28.17 58.95,28.27 58.88,28.27 58.06,29.08 58.09,32.89 47.83,37.85 47.8,37.87 47.8,41.07 48.64,41.86 49.91,41.86 50.47,42.47 50.47,44.12 51.16,44.81 52.43,46.15 52.3,49.56 52.3,49.68 55.75,49.78 56.31,50.11 62.87,50.16 64.97,46.86
I2C(CLK)  (via drill 0.2)
  Top 0.051: v79.63,17.02 80.77,15.88 80.77,15.62 J6.5
  Top 0.152: 67.31,83.06 J1.43 67.46,83.11 68.89,81.69
  GND_PLANE/TRACE 0.051: 73.15,71.75 67.44,77.47 67.46,77.47 | 73.15,71.75 73.28,71.63 | 73.15,71.75 73.15,62.99 | 73.15,62.99 v73.15,62.23 | 73.15,62.99 80.77,55.37 80.77,23.88 79.63,22.73 v79.63,17.02
  GND_PLANE/TRACE 0.152: 67.46,77.42 67.46,77.47 67.46,83.11 J1.43
  Bottom 0.051: v73.15,62.23 74.17,61.21 U2.27
I2C(DATA)  (via drill 0.2)
  Top 0.051: v81.15,20.83 78.36,18.03 78.36,15.62 J6.4
  Top 0.152: 64.77,83.06 J1.41 64.77,84.33 67.82,84.33 68.45,83.69 | 68.58,82.8 68.58,83.57 68.45,83.69 | 68.45,83.69 68.48,83.72 68.48,82.91 69.29,82.09
  GND_PLANE/TRACE 0.051: 72.14,79.25 73.66,77.72 73.66,64.01 v76.58,61.09 81.15,56.52 v81.15,20.83
  GND_PLANE/TRACE 0.152: 68.58,82.8 68.58,83.57 68.45,83.69 | 68.45,83.69 67.82,84.33 64.77,84.33 J1.41 | 72.14,79.25 68.48,82.91 68.48,83.72 68.45,83.69
  Bottom 0.051: v76.58,61.09 75.95,60.45 75.18,60.45 U2.29
INTVCC  (via drill 0.2)
  Top 0.051: v28.85,30.89 28.85,30.68 27.84,30.68 27.43,31.09 27.43,33.33 29.26,33.33 29.67,33.73 29.67,35.36 28.25,35.36 | v28.85,30.89 29.26,30.89 29.26,31.29 | R1.1 31.11,29.97 29.84,29.97 28.96,30.86 v28.85,30.89
  Top 0.152: v21.13,29.46 21.74,30.07 U1.F5 | 28.25,35.36 U1.A9
  GND_PLANE 0.152: 25.2,29.67 26.42,30.89 v28.85,30.89 | 25.2,29.67 24.99,29.46 | v21.13,29.46 21.74,30.07 24.79,30.07 25.2,29.67
N$4  (via drill 0.2)
  GND_PLANE/TRACE 0.051: v62.36,23.5 60.96,23.5 60.71,23.24 56.26,23.24 v47.88,31.62
  Bottom 0.051: v62.36,23.5 63.12,23.5 64.14,24.51 65.91,24.51 R16.2 | v47.88,31.62 46.86,30.61 46.86,30.23 OK2.16
N$5  (via drill 0.2)
  Top 0.051: v69.98,31.88 69.34,32.51 53.72,32.51 v52.96,31.75
  GND_PLANE/TRACE 0.051: v69.98,31.88 v76.83,25.02
  Bottom 0.051: v76.83,25.02 76.71,24.89 76.07,24.89 R18.2 | v52.96,31.75 51.94,30.73 51.94,30.23 OK2.14
N$7  (via drill 0.2)
  GND_PLANE/TRACE 0.051: v71.63,23.88 64.9,23.88 60.33,28.45 v58.67,28.45
  Bottom 0.051: v71.63,23.88 72.39,24.64 R20.2 | v58.67,28.45 57.02,30.1 OK2.12
N$9  (via drill 0.2)
  GND_PLANE/TRACE 0.051: v76.83,24.38 75.31,24.38 74.17,25.53 66.29,25.53 v63.12,28.7
  Bottom 0.051: v76.83,24.38 77.22,24.77 79.12,24.77 R22.2 | v63.12,28.7 62.1,29.72 62.1,30.1 OK2.10
N$10  (via drill 0.2)
  GND_PLANE/TRACE 0.051: v70.61,22.86 74.55,22.86 v77.47,19.94
  Bottom 0.051: v70.61,22.86 68.96,24.51 R21.2 | v77.47,19.94 78.36,19.05 78.36,18.41 OK3.16
N$11  (via drill 0.2)
  GND_PLANE/TRACE 0.051: v58.17,16.76 59.56,16.76 60.07,16.26 v71.75,16.26
  Bottom 0.051: v58.17,16.76 58.29,16.89 58.29,17.53 R19.2 | v71.75,16.26 73.28,17.78 73.28,18.29 OK3.14
N$12
  Bottom 0.051: R17.2 59.31,24.51 60.71,24.51 62.23,22.99 65.79,22.99 66.42,22.35 66.42,20.95 68.2,19.18 68.2,18.41 OK3.12
N$13  (via drill 0.2)
  GND_PLANE/TRACE 0.051: v63.37,19.94 v63.37,24.38
  Bottom 0.051: v63.37,24.38 63.25,24.51 62.48,24.51 R15.2 | v63.37,19.94 63.37,18.54 63.25,18.41 OK3.10
N$16  (via drill 0.2)
  Top 0.051: R5.2 76.2,43.69 74.93,44.96 72.52,44.96 v69.34,41.78
  Bottom 0.051: v69.34,41.78 68.33,40.77 68.33,40.51 OK1.1
OK1E1  (via drill 0.2)
  GND_PLANE/TRACE 0.051: 18.9,14.02 v18.9,14.83 18.92,14.73 23.5,14.73 24.13,14.1 30.61,14.1 | 30.61,14.1 30.99,14.1 31.37,13.72 33.02,13.72 | v45.72,25.53 43.81,25.53 43.69,25.65 41.66,25.65 38.84,23.09 38.76,23.01 38.76,22.25 38.02,21.51 38.02,21.08 37.39,20.45 37.24,20.45 36.6,19.81 33.53,19.81 30.61,16.89 30.61,14.1
  Bottom 0.051: 18.69,14.63 19.51,13.82 U3.3 | 18.69,14.63 17.07,16.26 R23.2 | 18.69,14.63 v18.9,14.83 | v45.72,25.53 49.28,29.08 49.28,30.1 OK2.15
OK1E2  (via drill 0.2)
  Top 0.051: v21.34,15.65 21.34,14.22 | v52.58,33.02 46.99,33.02 42.93,28.96 29.59,28.96 v29.46,29.08
  GND_PLANE/TRACE 0.051: v21.34,15.65 25.6,19.91 25.6,22.96 25.4,23.16 25.4,23.98 26.82,25.4 | 28.65,28.85 28.7,28.83 28.83,28.83 29.08,29.08 v29.46,29.08
  GND_PLANE/TRACE 0.152: 26.82,25.4 26.82,27.03 28.65,28.85
  Bottom 0.051: 20.73,15.04 21.95,13.82 U3.5 | 20.73,15.04 19.51,16.26 R25.2 | v21.34,15.65 20.73,15.04 | v52.58,33.02 54.36,31.24 54.36,30.23 OK2.13
OK1E3  (via drill 0.2)
  Top 0.051: v29.46,23.37 29.59,23.37
  GND_PLANE/TRACE 0.051: 24.38,14.43 v23.98,14.83 24,14.86 24,17.91 v29.46,23.37 29.59,23.37 40.64,34.42 51.82,34.42 v54.23,32
  Bottom 0.051: R27.2 22.55,16.26 v23.98,14.83 24.38,14.43 24.38,13.82 U3.7 | v54.23,32 57.4,32 59.18,30.23 59.44,30.23 OK2.11
  Bottom 0.152: v29.46,23.37 26.42,23.37
OK1E4  (via drill 0.2)
  Top 0.051: v28.45,19.05 28.45,15.75 27.56,14.86 27.05,14.86 v27.03,14.83 | v62.1,33.02 53.21,33.02 52.7,32.51 47.37,32.51 v47.12,32.26
  GND_PLANE/TRACE 0.051: 31.62,20.95 32.13,20.45 | 31.62,20.95 30.35,20.95 v28.45,19.05 | v47.12,32.26 41.27,32.26 34.47,26.26 34.01,25.81 33.68,25.81 32.03,24.08 31.93,23.62 31.62,23.29 31.62,20.95
  Bottom 0.051: 27.64,19.71 R29.2 27.56,19.43 28.07,19.43 v28.45,19.05 | v27.03,14.83 27.03,13.82 U3.9 | v62.1,33.02 64.52,30.61 64.52,30.23 OK2.9
OK2E1
  Bottom 0.051: U4.3 5.33,18.8 6.73,20.19 10.54,20.19 11.18,19.56 17.02,19.56 R24.2 17.14,19.43 17.91,18.67 17.91,18.16 18.92,17.14 33.78,17.14 37.59,20.95 42.29,20.95 47.37,15.88 52.96,15.88 55.88,12.95 66.04,12.95 68.71,15.62 72.9,15.62 75.56,18.29 75.82,18.29 OK3.15
OK2E2  (via drill 0.2)
  Top 0.051: v20.52,19.51 21.13,20.12 21.13,20.52 21.54,20.93 | 21.54,20.93 23.37,22.76 v23.37,22.96 | v7.92,19.71 9.75,19.71 9.75,19.91 10.77,20.93 21.54,20.93
  GND_PLANE/TRACE 0.051: v29.97,24.38 30.86,25.27 | v65.91,13.46 65.79,13.59 59.31,13.59 53.47,19.43 33.78,19.43 v33.66,19.3
  Bottom 0.051: v23.37,22.96 24.38,22.96 26.42,24.99 28.04,24.99 28.65,25.6 | 28.65,25.6 28.7,25.65 | 28.7,25.65 29.06,26.01 | v20.52,19.51 19.51,19.51 R26.2 | v7.92,19.71 7.92,18.9 U4.5 | 28.65,25.6 29.06,25.6 | 28.7,25.65 v29.97,24.38 29.97,24.26 30.48,23.75 30.48,23.24 33.78,19.94 33.78,19.43 v33.66,19.3 | v65.91,13.46 70.74,18.29 OK3.13
OK2E3  (via drill 0.2)
  Top 0.051: v10.36,19.71 15.44,19.71 16.05,20.32 v20.52,20.32 | v37.72,27.94 37.21,28.45 v32.26,28.45
  GND_PLANE/TRACE 0.051: 27.23,23.77 26.82,23.37 | 26.82,23.37 26.62,23.16 | 26.82,23.37 v25.81,23.37 | 27.43,23.62 v32.26,28.45
  GND_PLANE/TRACE 0.152: 27.23,23.77 27.43,23.77 27.43,23.62 27.43,22.96
  Bottom 0.051: v25.81,23.37 24.59,22.15 23.98,22.15 23.98,21.54 22.15,19.71 R28.2 21.95,19.71 21.13,19.71 v20.52,20.32 | v10.36,19.71 10.36,18.9 U4.7 | v37.72,27.94 49.4,16.26 63.37,16.26 65.41,18.29 65.66,18.29 OK3.11
OK2E4  (via drill 0.2)
  GND_PLANE/TRACE 0.051: v23.57,18.49 20.73,15.65 13.21,15.65 v13.21,17.68 | v31.5,20.45 32,19.94 33.15,21.08 33.15,21.31 32.26,22.1 32.26,23.44 34.7,26.01 45.85,26.04 46.23,25.65 46.23,25.27 47.75,24.08 47.83,24 47.83,21.01 48.39,20.45 49.61,20.45 50.11,19.94 54.97,19.94 55.47,20.45 56.26,20.45 59.94,16.76 v60.33,16.76
  Bottom 0.051: v23.57,18.49 24.59,19.51 R30.2 24.79,19.51 25.2,19.51 26.42,18.29 29.34,18.29 v31.5,20.45 | v13.21,17.68 12.8,18.09 12.8,18.69 U4.9 | v60.33,16.76 60.58,17.02 60.58,18.29 OK3.9
P3  (via drill 0.2)
  Top 0.051: 78.11,44.7 78.11,43.31 77.09,42.29 75.82,42.29 74.55,43.56 R5.1 | 78.11,44.7 79.63,44.7 80.39,43.94 80.39,43.69 SJ2.2 | 78.11,44.7 v78.11,44.83
  Bottom 0.051: 75.82,53.09 76.07,53.09 78.11,51.05 v78.11,44.83 | 75.82,53.09 75.18,53.09 U2.47 75.82,53.09 | 75.82,53.09 77.09,54.36 77.09,64.14 76.07,65.15 75.18,65.15 U2.17
P3_SW  (via drill 0.2)
  Top 0.051: 61.59,21.72 59.31,19.43 59.31,15.62 J3.2 | 61.59,21.72 78.87,38.99 78.87,43.56 SJ2.1 | v36.2,37.59 35.18,37.59 J2.4 | 61.59,21.72 v59.56,23.75
  GND_PLANE/TRACE 0.051: v36.2,37.59 49.91,37.59 57.4,30.1 57.4,25.91 v59.56,23.75
P18_SW1
  Bottom 0.051: R7.1 46.23,43.31 46.23,40.89 46.74,40.39 OK2.1
P18_SW2
  Bottom 0.051: R8.1 58.17,43.31 58.17,42.04 57.02,40.89 57.02,40.39 OK2.5
P18_SW3  (via drill 0.2)
  GND_PLANE/TRACE 0.051: v60.83,21.59 61.09,21.59 65.91,16.76 71.88,16.76 72.26,16.38 72.26,15.37 v72.01,15.11
  Bottom 0.051: v60.83,21.59 60.58,21.34 59.56,21.34 R9.1 | v72.01,15.11 78.36,8.76 78.36,8.26 OK3.1
P18_SW4  (via drill 0.2)
  GND_PLANE/TRACE 0.051: v73.91,19.94 73.91,15.37 v68.33,9.78
  Bottom 0.051: v73.91,19.94 73.91,21.34 R10.1 | v68.33,9.78 68.33,8.26 OK3.5
P18_SW5
  Bottom 0.051: R11.1 52.07,43.31 52.07,40.51 51.94,40.39 OK2.3
P18_SW6
  Bottom 0.051: R12.1 64.01,43.31 62.1,41.4 62.1,40.39 OK2.7
P18_SW7  (via drill 0.2)
  Top 0.051: v65.91,19.94 69.34,16.51 v69.34,12.57
  Bottom 0.051: v65.91,19.94 65.41,20.45 65.41,21.21 R13.1 | v69.34,12.57 73.28,8.64 73.28,8.26 OK3.3
P18_SW8  (via drill 0.2)
  GND_PLANE/TRACE 0.051: v76.83,19.94 76.83,17.65 68.45,9.27 63.75,9.27 v63.25,9.78
  Bottom 0.051: v76.83,19.94 76.83,21.34 R14.1 | v63.25,9.78 63.25,8.26 OK3.7
PBATT_SW  (via drill 0.2)
  Top 0.889: v14.83,53.24 12.19,55.88 SJ1.1 | v35.81,40.13 37.08,38.86 37.08,37.72 J2.5
  GND_PLANE/TRACE 0.889: v14.83,53.24 15.24,53.03 17.48,53.03 18.72,51.79 18.72,49.78 18.75,49.76 19.43,49.76 20.27,48.92 20.27,47.98 20.24,47.95 25.38,43.31 25.76,43.23 33.2,43.23 34.14,43.2 v35.81,40.13
PGND  (via drill 0.2, 0.2 pad 0.51, 3.17 pad 6.35)
  Top 0.051: 26.82,24.79 U1.B1
  Top 0.152: v5.08,5.08 5.08,4.32 | v5.08,5.08 6.86,6.86 | 6.91,6.91 v5.08,5.08 | U1.A5 28.04,30.07 27.43,29.46 27.43,29.26 27.36,29.18 | 23.77,39.42 23.77,41.25 R3.2 | v88.39,2.85 88.19,2.85 88.1,2.93 | 28.65,37.39 28.55,37.47
  GND_PLANE/TRACE 0.152: v88.39,2.85 88.39,3.25
  Bottom 0.051: v70.87,28.7 70.87,30.23 OK1.15
  other vias: 85.09,5.08 8.89,90.81 82.55,90.81 27.48,38.38 26.21,38.38 24.94,38.38 23.67,38.38 23.65,37.08 23.67,35.81 23.67,34.54 23.67,33.27 24.94,33.27 23.67,32.03 24.94,32.03 23.67,30.76 24.94,30.73 23.67,28.19 24.94,28.19 24.97,26.92 24.97,25.63 23.65,29.46 24.94,24.36 27.51,26.92 27.48,25.63 27.51,24.43 24.18,42.75 24.99,41.99 24.97,40.46 28.78,15.39 81.81,27.38
  pour GND_PLANE (isolate 0.254, rank 6, no thermals): 3.4,1.45 34.2,1.45 37.15,4.4 58.2,4.4 58.35,4.25 58.35,1.95 58.6,1.7 87,1.7 88.65,3.35 88.65,57.65 88.6,57.7 88.6,91.1 85.53,94.25 60.47,94.22 57.94,91.75 56.49,91.7 35.79,91.85 33.56,94.02 32,94.05 3.95,94.05 1.43,91.48 1.4,89.65 1.45,89.6 1.45,58.5 3.05,56.9 3.08,38.41 1.75,37.13 1.75,36.75 1.7,36.6 1.7,3.15
  pour Bottom (isolate 0.381, rank 6, no thermals): 3.4,1.45 34.2,1.45 37.15,4.4 57.72,4.4 58.35,3.77 58.35,1.95 58.6,1.7 87,1.7 88.65,3.35 88.65,57.65 88.6,57.7 88.6,91.1 85.53,94.25 60.47,94.22 57.94,91.75 56.49,91.7 35.79,91.85 33.56,94.02 32,94.05 3.95,94.05 1.43,91.48 1.4,89.65 1.45,89.6 1.45,58.5 3.05,56.9 3.08,38.41 1.75,37.13 1.75,36.75 1.7,36.6 1.7,3.15
  pour Top (isolate 0.254, no thermals): 6.63,1.47 3.71,1.47 1.75,3.43 1.75,14.43 5.31,17.98 8.26,17.98 11.02,15.21 11.02,5.11 12.78,3.35 29.26,3.35 31.5,5.59 31.5,24.28 35.28,27.99 43.87,27.99 45.92,31.9 88.04,31.42 88.54,27.13 88.54,3.38 86.94,1.78 59.05,1.78 58.32,2.51 58.32,3.99 57.76,4.55 36.8,4.55 33.88,1.63 6.71,1.63 6.58,1.5
  pour Top (isolate 0.254, no thermals): 22.83,38.1 22.66,43.08 22.99,43.51 27.95,43.51 28.48,43.11 28.55,39.24 28.55,37.47 28.35,37.26 27.51,37.26 27.3,37.06 27.3,36.07 27.13,35.89 26.34,35.89 26.14,35.69 26.14,29.57 26.39,29.31 27.23,29.31 27.41,29.13 27.41,28.32 27.64,28.09 29.67,28.07 30.1,27.71 30.18,25.5 30.76,25.17 30.76,8.08 29.41,6.73 21.62,6.73 17.83,10.52 17.83,13.28 19.46,14.91 28.12,14.91 28.55,15.7 28.52,22.2 27.25,23.65 25.35,23.65 25.27,23.72 25.02,23.77 24.03,24.61 24.1,26.92 23.77,27.3 22.89,27.33
PGOOD_PMA  (via drill 0.2)
  Top 0.051: 28.04,22.76 28.07,22.73 30.86,22.73 30.86,24.26 33.15,26.54 v36.2,26.54 | v63.12,16.76 64.26,15.62 J3.4
  Top 0.152: 28.04,22.76 26.21,24.59 26.21,29.46 26.82,30.07 U1.B5
  GND_PLANE/TRACE 0.051: v63.12,16.76 57.02,22.86 55.37,22.86 55.37,23.52 55.17,23.72 55.17,23.93 52.83,26.26 52.4,26.26 52.12,26.54 v36.2,26.54
RSENSE  (via drill 0.2, 0.2 pad 0.51)
  Top 0.152: v28.85,29.46 28.25,28.85 U1.A4 | v21.13,38.35 21.13,37.19 v21.16,37.08 | v19.48,40.79 19.51,40.03 19.51,40.84 19.71,41.05 19.71,41.45 | 19.51,42.47 v20.68,42.75
  GND_PLANE/TRACE 0.152: v28.85,29.46 24.38,29.46 24.38,29.67 23.98,30.07 20.93,30.07
  Bottom 0.152: v19.86,38.35 19.51,38 19.51,37.19 | 19.51,37.19 19.71,37.19 v19.89,37.08 | 19.71,34.54 19.71,33.33 v19.86,33.27 | 19.71,34.54 19.71,35.76 v19.86,35.81 19.71,35.97 19.3,35.97 18.9,36.37 18.9,36.58 19.51,37.19 | 19.71,34.54 v19.86,34.54
  other vias: 14.78,30.76 16.05,30.76 17.32,30.76 18.59,30.73 19.86,30.76 18.62,32 19.86,32.03 19.53,42.04
  pour Bottom (isolate 0.25, no thermals): 13.63,31.86 17.56,31.86 17.56,33.13 18.96,33.16 19.04,43.48 22.05,43.51 22.18,35.93 20.98,35.91 20.98,29.63 13.63,29.63
  pour Top (isolate 0.25, no thermals): 13.63,31.73 17.71,31.73 17.66,33.01 18.96,33.06 18.98,43.06 19.41,43.49 21.98,43.53 22.05,35.93 20.98,35.91 20.88,29.76 13.63,29.76
  pour GND_PLANE/TRACE (isolate 0.25, no thermals): 13.66,31.81 17.63,31.78 17.61,33.08 18.96,33.08 18.99,43.46 22,43.48 22.18,35.93 20.98,35.91 20.93,29.71 13.63,29.71
SETFREQ  (via drill 0.2)
  Top 0.051: 29.39,32.24 v28.85,31.7 28.96,31.62 31.37,31.62 33.02,29.97 R1.2 33.15,29.97 35.43,29.97 R2.1
  Top 0.152: v28.85,34.75 28.85,34.54 27.64,34.54 27.03,33.93 U1.B8
  GND_PLANE/TRACE 0.152: 28.25,33.33 26.21,33.33 | 28.25,33.33 28.25,32.31 v28.85,31.7 | v28.85,34.75 28.25,34.14 28.25,33.33
SGND  (via drill 0.2)
  Top 0.051: v28.85,32.51 30.86,32.51 31.5,31.88 35.56,31.88 36.2,31.24 | 36.2,31.24 37.34,30.1 R2.2 | 36.2,31.24 v43.69,31.24
  Top 0.152: U1.A7 28.25,32.51 v28.85,32.51 28.85,32.31
  Bottom 0.051: v43.69,31.24 43.69,32.26 SJ4.2
  Bottom 0.152: v28.85,32.51 28.65,32.51 26.42,34.75 SJ3.2
SW1  (via drill 0.2 pad 0.51)
  other vias: 14.78,24.41 16.05,24.41 17.35,24.41 13.51,24.41 6.4,24.23 9.47,24.23 7.92,24.23 5.71,25.63 10.16,25.63 6.4,26.87 9.47,26.87 7.92,26.87 14.78,25.68 16.05,25.68 17.35,25.68 13.51,25.68 14.78,28.22 16.05,28.22 17.35,28.22 13.51,28.22 14.76,26.97 16.03,26.97 17.32,26.97 13.49,26.97
  pour Bottom (no thermals): 18.47,29.11 13.08,29.03 13.06,31.72 1.96,31.7 1.91,21.84 18.47,21.95 18.52,24.41 18.47,28.85
  pour GND_PLANE/TRACE (isolate 0.127, no thermals): 18.44,29.21 12.98,29.16 13,31.83 1.91,31.83 1.91,21.84 18.49,21.79 18.52,24.41
  pour Top (no thermals): 13.06,29.03 13.06,31.7 1.96,31.7 1.93,21.84 18.49,21.92 18.44,24.46 18.41,29.11
SW2  (via drill 0.2 pad 0.51)
  other vias: 6.38,33.5 9.42,33.53 7.85,33.5 9.42,36.5 6.35,36.53 7.87,36.53 10.19,35.08 5.66,35.08 14.78,34.57 16.08,34.57 14.76,33.3 16.05,33.3 17.32,34.52
  pour Top (no thermals): 11.56,35.56 11.63,36.98 1.8,37.08 1.78,32.41 17.07,32.38 17.07,33.55 18.34,33.53 18.34,35.53
  pour GND_PLANE/TRACE (no thermals): 11.68,35.64 11.68,36.98 1.8,37.08 1.8,32.21 17.2,32.21 17.17,33.5 18.39,33.48 18.44,35.61
  pour Bottom (isolate 0.254, no thermals): 11.63,35.61 11.63,36.98 1.8,37.08 1.78,32.41 17.02,32.38 17.07,32.41 17.07,33.55 18.34,33.55 18.34,35.53
SW_P18H1  (via drill 0.2)
  GND_PLANE/TRACE 0.051: 68.96,53.34 68.71,53.34 | 68.71,53.34 65.28,53.34 60.96,49.02 60.96,48.64 v60.45,48.13 | v71.75,55.88 71.25,55.88 68.71,53.34
  Bottom 0.051: v71.75,55.88 73.79,57.91 75.06,57.91 U2.35 | v60.45,48.13 60.33,48.13 55.63,43.43 54.99,43.43 R11.2
SW_P18H2
  Bottom 0.051: 65.02,52.58 64.9,52.7 64.9,57.4 65.79,58.29 66.8,58.29 U2.34 | 65.02,52.58 65.15,52.45 | 65.02,52.58 65.02,50.67 66.93,48.77 66.93,43.43 R12.2
SW_P18H3  (via drill 0.2)
  GND_PLANE/TRACE 0.051: v71.12,55.12 70.48,54.48 70.48,51.94 67.69,49.15 v67.69,26.42
  Bottom 0.051: v71.12,55.12 71.12,55.88 70.99,56.01 70.99,56.26 73.53,58.8 U2.33 | v67.69,26.42 67.69,24 68.07,23.62 68.07,21.34 R13.2
SW_P18H4  (via drill 0.2)
  Top 0.051: v71.75,55.24 68.45,58.55 v68.33,58.55
  GND_PLANE/TRACE 0.051: v71.75,55.24 71.75,50.29 71.5,50.04 71.5,48.26 79.63,40.13 v79.63,24
  Bottom 0.051: v68.33,58.55 67.69,59.18 66.93,59.18 U2.32 | v79.63,24 79.63,21.46 R14.2
SW_P18L1  (via drill 0.2)
  GND_PLANE/TRACE 0.051: v73.53,56.39 66.29,56.39 65.02,57.66 | 64.64,58.04 65.02,57.66 | 65.02,57.66 v50.8,43.43
  Bottom 0.051: v73.53,56.39 75.06,56.39 U2.39 | v50.8,43.43 49.02,43.43 R7.2
SW_P18L2  (via drill 0.2)
  Top 0.051: v65.41,53.85 v60.45,48.9
  Bottom 0.051: v65.41,53.85 65.53,53.98 65.53,56.39 65.91,56.77 66.8,56.77 U2.38 | v60.45,48.9 60.45,48.77 60.96,48.26 60.96,43.43 R8.2
SW_P18L3  (via drill 0.2)
  GND_PLANE/TRACE 0.051: v60.58,24 60.58,25.53 57.78,28.32 57.78,39.88 v69.98,52.07
  Bottom 0.051: v69.98,52.07 73.03,55.12 73.03,56.52 73.66,57.15 75.06,57.15 U2.37 | v60.58,24 62.36,22.23 62.36,21.34 R9.2
SW_P18L4  (via drill 0.2)
  GND_PLANE/TRACE 0.051: v70.99,54.36 70.99,51.56 68.71,49.28 68.71,28.19 v69.47,27.43
  Bottom 0.051: v70.99,54.36 67.82,57.53 66.93,57.53 U2.36 | v69.47,27.43 71.12,25.78 71.12,21.46 R10.2
SW_RUNPMA  (via drill 0.2)
  Top 0.152: v29.06,33.93 28.25,33.93 U1.A8
  GND_PLANE/TRACE 0.051: v29.06,33.93 29.08,34.04 31.75,34.04 60.45,62.74 v68.33,62.74
  Bottom 0.051: v68.33,62.74 75.06,62.74 U2.23
SW_TP1  (via drill 0.2)
  Top 0.051: v60.71,9.91 60.33,10.29 59.31,10.29 J3.7
  GND_PLANE/TRACE 0.051: v76.58,58.93 74.04,56.39 74.04,56.26 73.03,55.24 73.03,54.99 73.66,54.36 v73.66,46.74 | v60.71,9.91 62.48,9.91 63.5,8.89 68.45,8.89 78.11,18.54 78.11,27.94 70.87,35.18 v70.87,38.86
  Bottom 0.051: v76.58,58.93 75.95,59.56 75.18,59.56 U2.31 | v73.66,46.74 70.87,43.94 70.87,40.51 OK1.2 70.87,40.39 v70.87,38.86
TP1_OUT  (via drill 0.2)
  Top 0.051: J4.3 42.67,15.11 42.67,14.73 44.45,12.95 47.37,12.95 48.51,14.1 48.51,15.11 J4.6 48.64,15.24 49.66,16.26 | 49.66,16.26 53.21,16.26 56.39,13.08 59.31,13.08 61.72,10.67 61.72,10.41 J3.8 | 47.5,22.99 48.64,24.13 48.64,25.15 J5.6 48.77,25.27 49.78,25.27 51.44,26.92 54.23,26.92 R36.1 54.36,27.05 55.24,27.05 56.77,28.57 | 47.5,22.99 47.37,22.86 44.58,22.86 42.8,24.64 42.8,25.15 J5.3 | 56.77,28.57 57.4,28.57 R35.2 56.77,28.57 | v66.55,32 66.42,32.13 60.33,32.13 56.77,28.57 | 49.66,16.26 47.5,18.41 47.5,22.99
  Bottom 0.051: v66.55,32 68.2,30.35 OK1.16
UART0_RX  (via drill 0.2)
  Top 0.051: v39.24,40.39 39.24,37.72 J2.6 | v77.09,16.89 75.82,15.62 J6.3 | v70.99,57.66 v73.53,55.12
  GND_PLANE/TRACE 0.051: v65.41,61.85 59.94,61.85 39.24,41.15 v39.24,40.39 | v77.09,16.89 77.09,17.14 79.25,19.3 79.25,22.73 80.39,23.88 80.39,48.26 v73.53,55.12
  Bottom 0.051: v65.41,61.85 65.79,62.23 | 65.79,62.23 65.91,62.36 66.8,62.36 U2.24 | v70.99,57.66 70.99,59.56 68.33,62.23 65.79,62.23
UART0_TX  (via drill 0.2)
  Top 0.051: v41.4,42.67 39.37,42.67 39.24,42.55 J2.3 | v69.47,20.19 73.15,16.51 73.15,15.62 J6.2 | v50.67,46.48 v58.29,38.86
  GND_PLANE/TRACE 0.051: v68.33,61.59 65.79,61.59 v50.67,46.48 46.86,42.67 v41.4,42.67 | v69.47,20.19 68.2,20.19 60.45,27.94 58.55,27.94 58.17,28.32 58.17,38.73 v58.29,38.86
  Bottom 0.051: v68.33,61.59 66.93,61.59 U2.26
VBATT_IN  (via drill 0.2)
  Top 0.889: 7.92,55.88 10.57,55.88 SJ1.2 10.77,55.47 10.77,55.07 10.97,54.66 17.07,48.56 18.09,48.56 v18.09,47.75 | 7.92,55.88 7.92,53.65 L1.1 | 7.92,55.88 7.72,56.29 7.52,56.49 7.52,58.52 C1.A1 | v62.99,15.49 61.85,15.49 J3.3 | v45.34,33.66 44.32,32.64 33.66,32.64 v29.34,36.96
  GND_PLANE 0.889: v18.09,47.75 18.49,47.75 | v62.99,15.49 62.99,15.75 54.86,23.88 54.86,25.78 46.99,33.66 v45.34,33.66
  Bottom 0.889: v18.09,47.75 26.01,47.75 26.01,41.45 26.21,41.05 26.54,40.77 29.34,37.97 v29.34,36.96
VFB  (via drill 0.2)
  Top 0.051: v29.46,28.45 29.46,28.32 30.99,26.8 R4.2
  Top 0.152: v24.99,34.54 26.01,34.54 26.21,34.34 26.21,32.11 26.82,31.5 U1.B6
  Bottom 0.051: v29.46,28.45 27.64,28.45 27.23,28.85 26.82,28.85
  Bottom 0.152: 27.03,28.65 26.82,28.85 26.42,29.26 | 26.42,29.26 26.21,29.46 | v24.99,34.54 24.59,34.14 24.59,30.37 24.88,30.07 25.2,30.07 26.01,29.26 26.42,29.26
VIN  (via drill 0.2 pad 0.51)
  other vias: 6.38,42.52 7.8,42.52 9.35,42.52 6.2,45.54 7.77,45.59 9.27,45.62 10.19,44.09 5.49,43.99 14.81,38.38 16.05,38.33 17.32,38.35 14.81,37.08 16.08,37.08 17.35,37.11 13.54,38.33 13.54,37.11 14.78,39.6 16.05,39.67 17.32,39.65
  pour Bottom (isolate 0.254, no thermals): 18.52,36.04 12.78,36.02 12.78,37.47 3.05,37.52 3.05,47.8 18.49,47.85
  pour GND_PLANE/TRACE (no thermals): 18.52,36.04 12.78,36.02 12.78,37.47 3.05,37.52 3.05,47.8 18.49,47.85
  pour Top (no thermals): 18.52,36.04 12.78,36.02 12.78,37.47 3.05,37.52 3.05,47.8 18.52,47.83
VOUT  (via drill 0.2 pad 0.51)
  Bottom 0.406: 21.13,24.38 v21.16,24.46 | 22.35,24.38 v22.4,24.46
  other vias: 19.86,25.65 21.16,25.68 22.4,25.68 19.86,26.95 21.16,26.97 19.89,28.19 21.13,28.19 19.86,24.43
  pour Top (no thermals): 27.84,15.47 25.35,15.47 18.97,22.02 18.97,29.16 22.23,29.16 22.23,26.75 23.5,26.75 23.5,26.7 23.52,26.7 23.52,24.46 25.1,22.89 27.13,22.89 27.84,22.17
  pour GND_PLANE/TRACE (no thermals): 27.81,15.47 25.32,15.49 18.97,21.46 18.97,29.16 22.23,29.16 22.23,26.75 23.5,26.75 23.5,26.7 23.52,26.7 23.52,24.46 25.1,22.89 27.13,22.89 27.84,22.17 27.84,15.7
VOUTA  (via drill 0.2)
  Top 0.381: 26.82,8.13 27.64,8.13 R31.2 | 26.82,8.13 26.21,8.13 | 26.21,8.13 25.6,8.13 R33.2 25.4,8.13 25.4,9.35 23.77,9.35 R32.2 | v26.42,6.3 26.21,6.5 26.21,8.13 | Q7.D 27.03,12.8 29.87,12.8 Q5.D | Q3.D 20.12,12.6 20.12,9.75 19.91,9.55 R34.2 19.91,9.35 19.91,6.5 v18.9,5.49 | Q3.D 20.32,12.8 23.37,12.8 Q1.D 23.57,12.8 26.82,12.8 Q7.D | 20.12,14.83 20.12,12.8 Q3.D | 20.12,14.83 20.12,17.27 19.91,17.48 L3.2 | 26.82,8.13 26.82,12.6 Q7.D | 20.12,14.83 15.54,10.26 | 15.54,10.26 14.43,9.14 C5.A1 | v11.58,10.36 15.44,10.36 15.54,10.26 | 29.84,11.05 29.84,12.57 Q5.D | v57.53,25.02 57.53,26.92 R35.1 | v71.37,26.42 65.28,20.32 65.28,19.68 66.8,18.16 66.8,15.62 J3.5 | v30.86,22.23 30.86,13.84 29.97,12.95 Q5.D
  GND_PLANE/TRACE 0.381: v26.42,6.3 26.42,6.35 26.54,6.48 | v57.53,25.02 55.37,25.02 47.5,32.89 41.27,32.89 34.47,26.9 33.98,26.42 33.58,26.54 31.39,24.36 31.39,23.98 30.86,23.29 v30.86,22.23
  Bottom 0.381: 3.45,9.35 3.86,9.35 U4.19 | 3.45,9.35 2.85,9.35 U4.20 | 6.5,10.77 6.5,10.97 5.08,10.97 3.45,9.35 | 6.5,10.77 6.5,9.35 U4.17 | 9.14,10.77 9.14,9.35 U4.15 | 6.5,10.77 9.14,10.77 | 11.58,10.77 11.58,10.97 9.35,10.97 9.14,10.77 | 11.58,10.77 v11.58,10.36 11.58,9.35 U4.13 | 11.58,10.77 14.22,10.77 14.22,9.35 U4.11 | 26.42,6.1 27.03,6.1 28.25,4.88 28.25,4.47 U3.11 | 26.42,6.1 25.81,6.1 25.81,4.47 U3.13 | v26.42,6.3 26.42,6.1 | 17.68,4.47 18.09,4.47 U3.19 | 17.68,4.47 16.87,4.47 U3.20 | 20.52,5.89 20.52,4.47 U3.17 | 20.52,5.89 19.1,5.89 18.8,5.59 | 17.68,4.47 18.8,5.59 | 20.52,5.89 23.16,5.89 23.16,4.47 U3.15 | v18.9,5.49 18.8,5.59 | R22.1 79.12,26.16 76.2,26.16 R18.1 76.07,26.04 75.69,25.65 74.17,25.65 73.91,25.91 72.52,25.91 R20.1 72.26,26.04 71.63,26.67 | 57.91,24.64 59.18,25.91 R17.1 59.31,25.78 62.36,25.78 R15.1 62.48,25.91 65.91,25.91 R16.1 65.79,26.04 66.93,27.18 67.44,27.18 | 57.91,24.64 57.78,24.51 57.78,20.07 58.29,19.56 58.29,18.92 R19.1 | 67.44,27.18 67.82,27.18 68.83,26.16 68.83,26.04 R21.1 | 57.91,24.64 v57.53,25.02 | 71.63,26.67 69.98,28.32 68.45,28.32 67.44,27.3 67.44,27.18 | v71.37,26.42 71.63,26.67

## Text on the board
Document: 4-Channel uCAT Subsystem Controller PCB / Rev: 2G Date: 29 May 2014 / Part No: B / Assy No: 4CU / Subsystem: MCAT / Project: BRICSAT / Micro-propulsion and Nanotechnology Lab / (c) George Washington University, 2014 / Design by: Samudra Haque, N3RDX, G19124781